# Altium PCB Mixed Signal Board.PcbDoc (part 3 of 3)
Units mm, origin at the board's own origin, x right, y up, seen from the top; angles counter-clockwise.
Board outline 75 x 70 mm, 4 copper layers (Top Layer, GND, VCC, Bottom Layer), stack 1.565 mm thick; 188 components, 143 nets, 738 pads, 413 vias.
Unrouted connection lines stored in the file: 2.
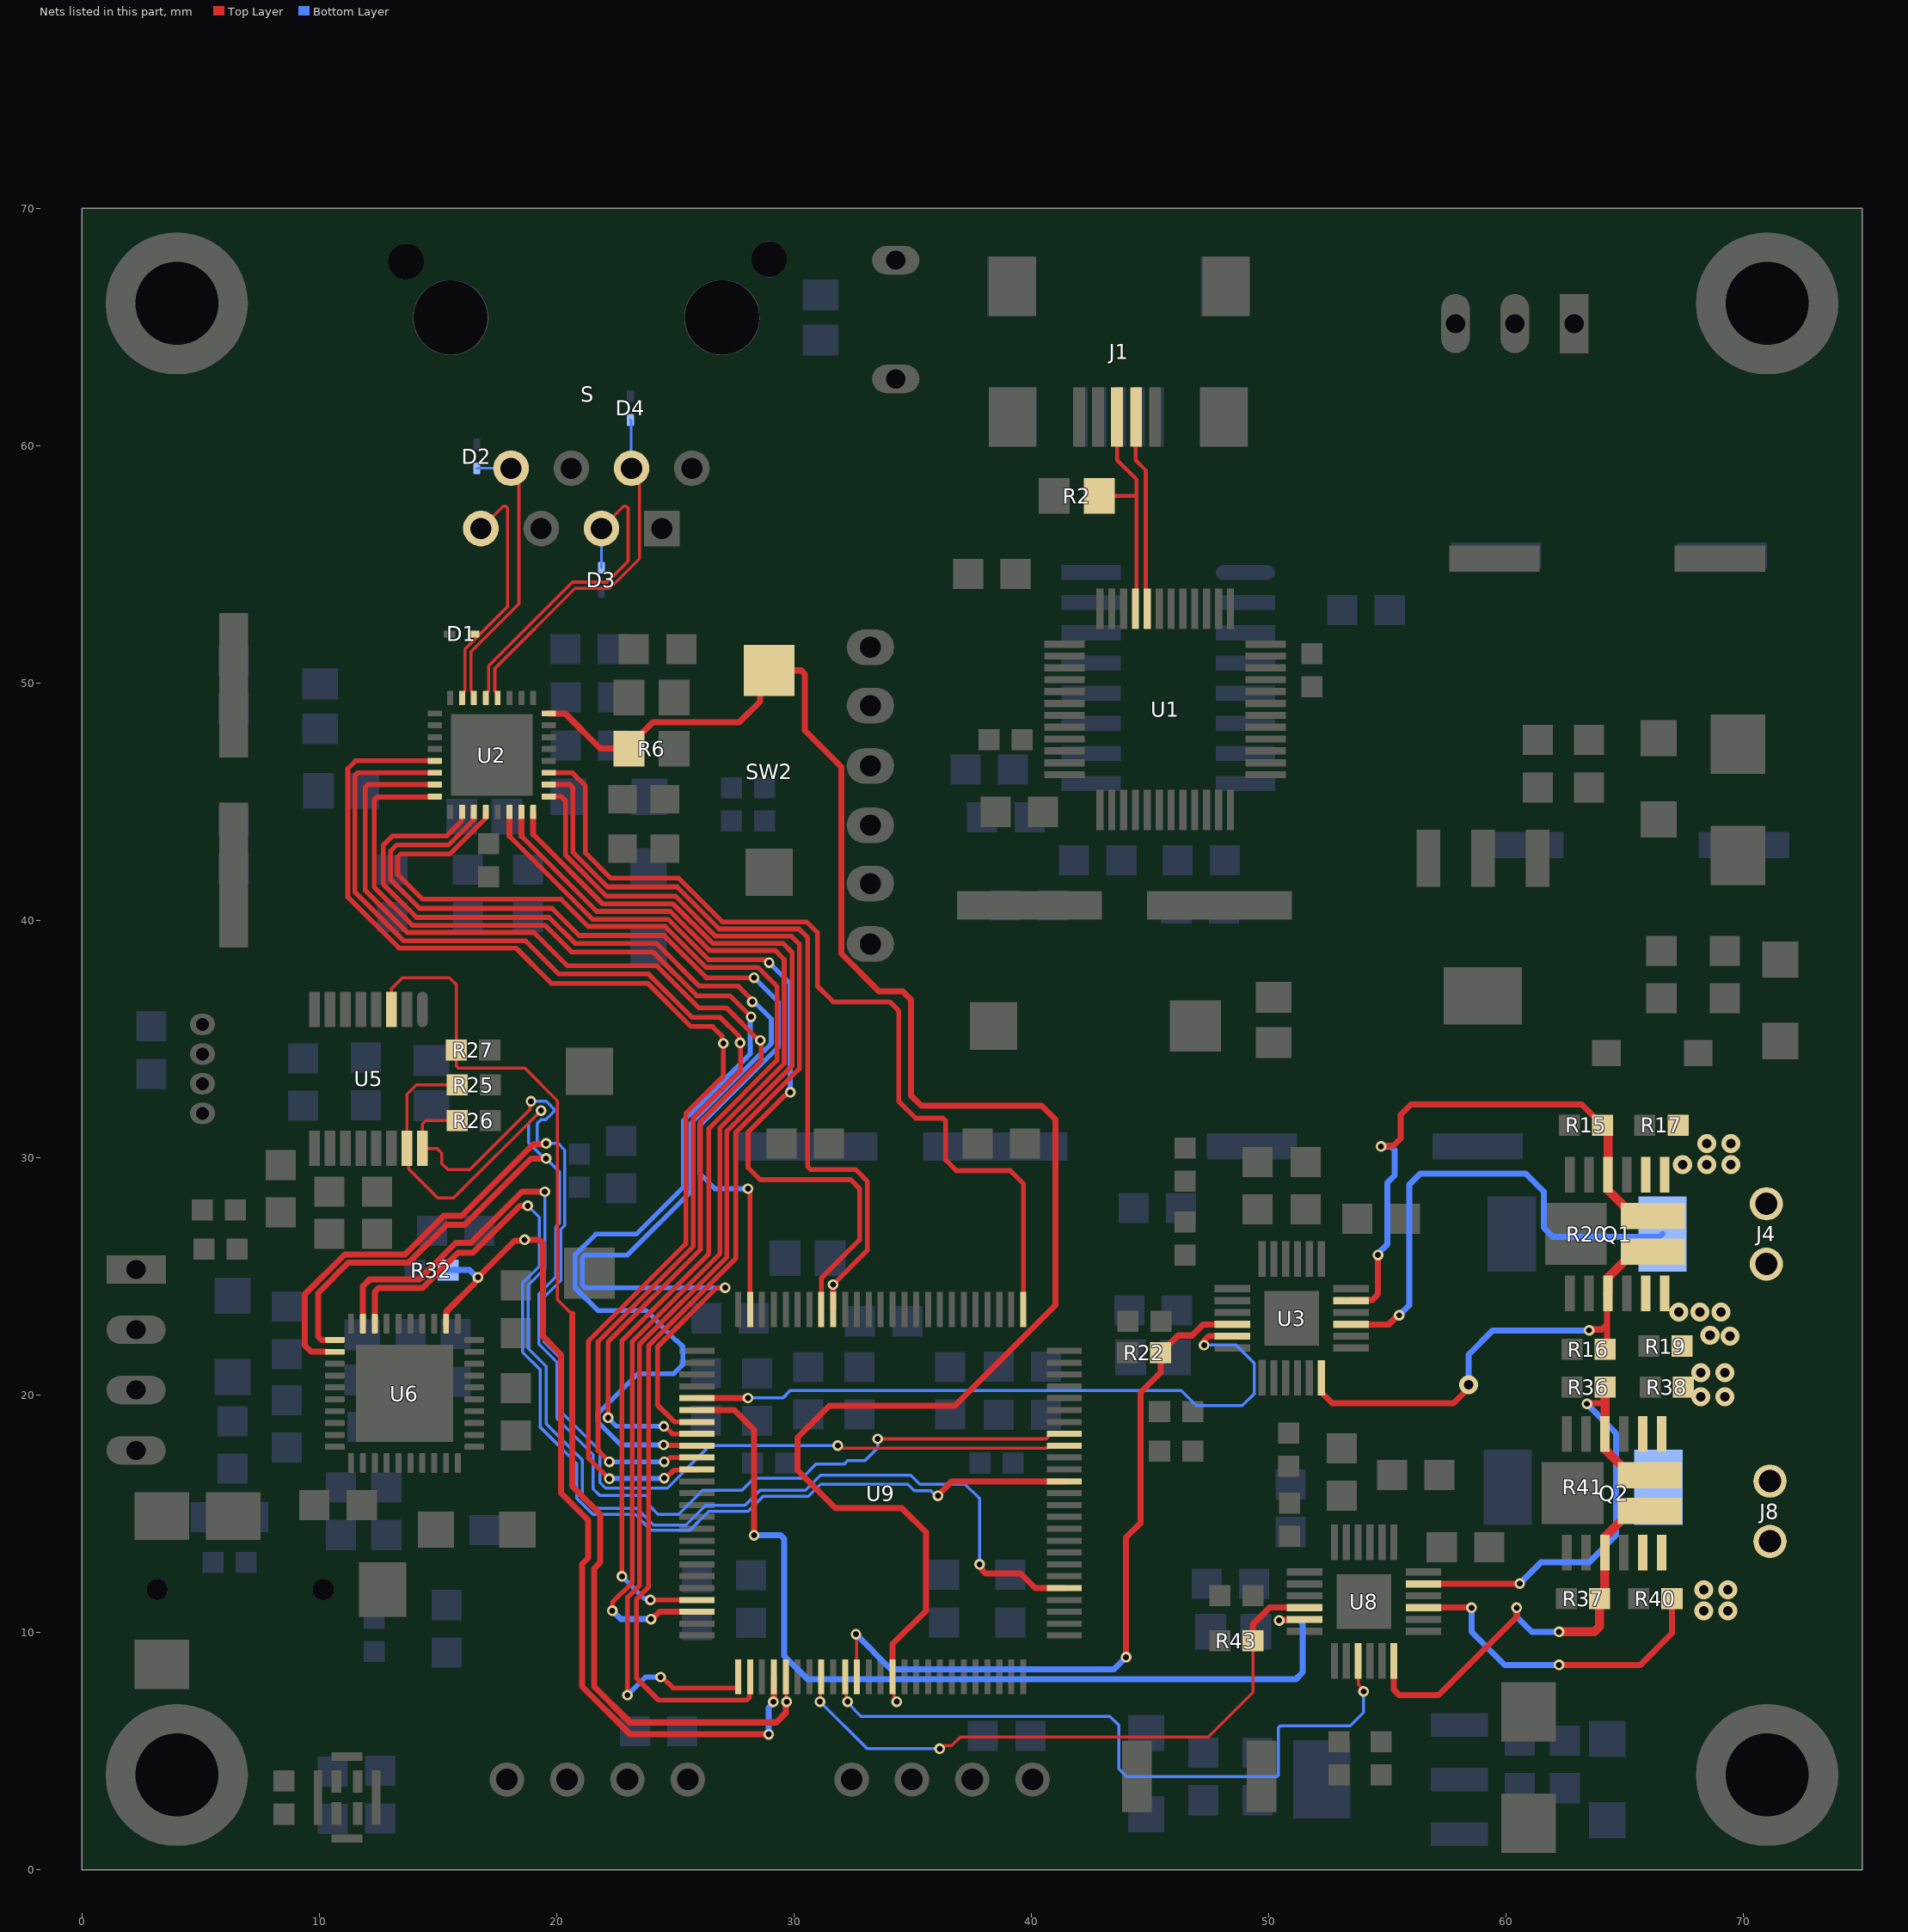
[diagram p5: the nets of this part, all layers, seen from the top]

## Via types
v1: diameter 0.45, hole 0.25, Top Layer to Bottom Layer, 268 vias
v2: diameter 1.27, hole 0.711, Top Layer to Bottom Layer, 82 vias
v3: diameter 0.8, hole 0.4, Top Layer to Bottom Layer, 63 vias

## Nets (pads, with @x,y where several pads share a name; then routed paths per layer and width w, separated by ;. In a path a pad name is that pad's centre, name@x,y a point inside that pad or via, vN(x,y) a via of type N, cw(c..) or ccw(c..) an arc to the next point about the centre after c; other vN are vias at no path point) (continued)
PH_2: U8.15 U9.60 | length 29.8
  Top Layer w0.127: U9.60@32.155,8.137 32.208,8.084 32.208,7.14 v1(32.261,7.088) ; U8.15@53.772,8.799 53.772,7.834 54,7.606 v1(54,7.518)
  Bottom Layer w0.127: v1(32.261,7.088) 32.261,7.043 32.83,6.474 43.31,6.474 43.688,6.096 43.688,4.265 44.016,3.937 50.345,3.937 50.419,4.011 50.419,5.996 50.493,6.071 53.442,6.071 54,6.629 v1(54,7.518)
PHY_RESET: R6.1 SW2.2 U2.32 U9.64 | length 76.8
  Top Layer w0.127: U9.64@34.155,8.137 34.218,8.073 34.218,7.292 34.331,7.179 v1(34.331,7.092)
  Top Layer w0.254: U2.32@19.669,48.727 19.671,48.725 20.363,48.725 21.844,47.244 R6.1@23.053,47.244 23.053,47.344 24.071,48.362 27.711,48.362 28.58,49.23 28.58,50.161 SW2.2@28.956,50.537 30.306,50.537 30.455,50.388 30.455,48.006 31.996,46.464 31.996,38.61 33.598,37.008 34.595,37.008 34.925,36.678 34.925,32.639 35.362,32.202 40.442,32.202 41.021,31.623 41.021,23.793 36.786,19.558 31.496,19.558 30.155,18.217 30.155,16.835 31.75,15.24 34.544,15.24 35.56,14.224 35.56,10.922 34.155,9.517 U9.64@34.155,8.137
RD_N: D4.K S.6 U2.4 | length 15.3
  Top Layer w0.132: U2.4@17.519,49.377 17.519,49.552 17.399,49.673 17.399,50.622 20.777,54 22.247,54 23.495,55.248 23.495,58.351 23.161,58.685 S.6@23.161,59.055
  Bottom Layer w0.114: D4.K@23.114,61.087 23.138,61.063 23.138,59.079 S.6@23.161,59.055
RD_P: D3.K S.5 U2.5 | length 14.9
  Top Layer w0.132: U2.5@17.019,49.377 17.019,49.552 17.14,49.673 17.14,50.729 20.67,54.259 22.14,54.259 23.015,55.134 23.015,57.376 22.938,57.453 22.829,57.453 S.5@21.891,56.515
  Bottom Layer w0.114: D3.K@21.891,54.861 S.5@21.891,56.896
RESET: R27.1 U5.3 U9.55 | length 48.2
  Top Layer w0.127: U5.3@13.051,36.254 13.051,37.139 13.504,37.592 15.494,37.592 15.786,37.3 R27.1@15.786,34.544 15.786,33.856 15.861,33.782 18.669,33.782 20.041,32.41 20.041,24.028 20.64,23.429 20.665,23.429 ; U9.55@29.655,8.137 29.674,8.118 29.674,7.105 v1(29.693,7.087)
  Top Layer w0.254: 20.665,23.429 20.665,16.165 21.844,14.986 21.844,12.954 21.577,12.687 21.577,7.734 23.096,6.216 29.258,6.216 29.655,6.613 29.655,7.049 v1(29.693,7.087)
RESET_DAC: R32.1 U6.32 U9.54 | length 38.1
  Top Layer w0.254: U6.32@15.343,23.015 15.345,23.017 15.345,23.512 16.59,24.757 16.59,24.817 16.688,24.915 v1(16.688,24.968) 18.234,26.514 18.617,26.514 v1(18.655,26.552) ; v1@18.656,26.543 18.665,26.552 19.273,26.552 19.431,26.394 19.431,22.479 20.193,21.717 20.193,15.875 21.336,14.732 21.336,13.144 21.082,12.89 21.082,7.729 23.085,5.726 28.927,5.726 v1(28.938,5.715) ; v1(29.134,7.087) 29.155,7.108 U9.54@29.155,8.137
  Bottom Layer w0.254: R32.1@15.43,25.273 16.33,25.273 16.635,24.968 v1(16.688,24.968) ; v1(28.938,5.715) 28.938,6.84 29.134,7.036 v1(29.134,7.087)
RX_CLK: U2.19 U9.24 | length 40.1
  Top Layer w0.203: U2.19@16.519,44.577 16.496,44.553 16.496,44.229 15.446,43.179 13.256,43.179 13.003,42.926 13.003,41.734 14.224,40.513 19.812,40.513 20.955,39.37 24.527,39.37 26.305,37.592 v1(28.321,37.592) ; v1(28.067,28.702) 28.067,28.635 28.155,28.547 U9.24@28.155,23.613
  Bottom Layer w0.203: v1(28.067,28.702) 26.67,28.702 26.035,29.337 26.035,31.369 29.35,34.684 29.35,36.563 v1(28.321,37.592)
RX_D0: U2.16 U9.34 | length 55.6
  Top Layer w0.203: U2.16@14.869,45.227 14.846,45.204 12.438,45.204 12.319,45.085 12.319,41.402 13.921,39.8 19.509,39.8 20.637,38.672 24.066,38.672 25.908,36.83 27.305,36.83 v1(28.194,35.941) ; v1(24.511,17.907) 24.527,17.891 25.901,17.891 U9.34@25.917,17.875
  Bottom Layer w0.203: v1(24.511,17.907) 22.714,17.907 21.748,18.873 21.748,19.227 23.431,20.91 24.942,20.91 25.325,21.293 25.325,22.046 25.075,22.296 25.043,22.296 23.77,23.57 21.737,23.57 20.779,24.527 20.779,25.915 21.65,26.786 23.357,26.786 25.351,28.78 25.351,31.574 28.159,34.382 28.159,35.906 v1(28.194,35.941)
RX_D1: U2.15 U9.33 | length 49.1
  Top Layer w0.203: U2.15@14.869,45.727 12.057,45.727 11.938,45.608 11.938,41.275 13.716,39.497 19.05,39.497 20.447,38.1 24.209,38.1 25.987,36.322 27.153,36.322 28.524,34.951 28.569,34.951 v1(28.585,34.951) ; v1(22.174,19.05) 22.174,22.251 26.059,26.136 26.059,31.52 28.62,34.081 28.62,34.854 v1@28.569,34.905 ; v1(24.518,18.692) 24.558,18.692 24.875,18.375 U9.33@25.917,18.375
  Bottom Layer w0.203: v1(22.174,19.05) 22.532,18.692 v1(24.518,18.692)
RX_D2: U2.14 U9.35 | length 51.4
  Top Layer w0.203: U2.14@14.869,46.227 14.671,46.227 11.627,46.227 11.508,46.108 11.508,41.197 11.567,41.138 13.56,39.145 18.695,39.145 18.754,39.086 20.093,37.746 23.876,37.746 25.707,35.916 26.899,35.916 27.7,35.114 27.7,34.881 v1(27.732,34.849) ; v1(22.225,17.196) 21.748,17.673 21.748,22.253 25.756,26.261 25.756,31.674 27.747,33.666 27.747,34.849 v1@27.74,34.856 ; v1(24.536,17.196) 24.603,17.196 24.773,17.366 25.908,17.366 U9.35@25.917,17.375
  Bottom Layer w0.203: v1(22.225,17.196) v1(24.536,17.196)
RX_D3: U2.13 U9.36 | length 52.7
  Top Layer w0.203: U2.13@14.869,46.727 11.531,46.727 11.205,46.401 11.205,40.992 13.355,38.842 18.291,38.842 18.35,38.783 19.74,37.393 19.777,37.355 23.839,37.355 25.659,35.535 26.568,35.535 26.978,35.125 26.978,34.871 v1(27.026,34.823) 27.026,33.452 25.449,31.875 25.449,26.383 21.336,22.27 21.336,17.369 v1(22.224,16.482) ; v1(24.536,16.51) 24.603,16.51 24.943,16.85 25.892,16.85 U9.36@25.917,16.875
  Bottom Layer w0.203: v1(22.224,16.482) 22.238,16.496 24.522,16.496 v1(24.536,16.51)
RX_DV: U2.18 U9.32 | length 54.4
  Top Layer w0.203: U2.18@16.019,44.577 15.996,44.553 15.996,44.194 15.367,43.565 13.085,43.565 12.7,43.18 12.7,41.529 14.097,40.132 19.685,40.132 20.779,39.038 24.208,39.038 26.004,37.242 27.655,37.242 27.91,36.987 27.91,36.977 28.245,36.643 v1(28.245,36.576) ; U9.32@25.917,18.875 24.965,18.875 24.257,19.583 24.257,22.047 26.744,24.534 v1(27.104,24.534)
  Bottom Layer w0.203: v1(27.104,24.534) 21.201,24.534 21.082,24.653 21.082,25.789 21.201,25.908 22.987,25.908 25.654,28.575 25.654,31.448 28.715,34.51 28.747,34.51 29.027,34.789 29.027,34.821 29.047,34.841 29.047,35.85 28.444,36.453 28.435,36.453 28.312,36.576 v1(28.245,36.576)
RX_ER: U2.20 U9.47 | length 54.5
  Top Layer w0.203: U2.20@17.019,44.577 16.996,44.553 16.996,44.301 15.494,42.799 13.425,42.799 13.306,42.68 13.306,41.939 14.351,40.894 20.193,40.894 21.336,39.751 24.575,39.751 26.307,38.018 28.498,38.018 29.288,37.228 29.288,34.114 26.416,31.242 26.416,25.959 22.758,22.301 v1(22.758,12.37) ; v1(23.952,11.379) 23.954,11.377 25.915,11.377 U9.47@25.917,11.375
  Bottom Layer w0.203: v1(22.758,12.37) 23.702,11.426 23.905,11.426 v1(23.952,11.379)
SCL: R26.1 U5.16 U6.2 U9.92 | length 65.1
  Top Layer w0.127: R26.1@15.812,31.572 14.5,31.572 14.351,31.423 U5.16@14.351,30.404 14.957,30.404 15.169,30.192 15.169,29.765 15.434,29.5 16.346,29.5 18.885,32.039 18.885,32.347 v1(18.923,32.385) ; v1(31.852,17.882) 31.939,17.882 32.048,17.772 40.68,17.772 40.782,17.875 U9.92@41.393,17.875
  Top Layer w0.254: U6.2@10.365,21.83 9.666,21.83 9.398,22.098 9.398,24.257 11.076,25.935 13.616,25.935 15.24,27.559 16.002,27.559 19.012,30.569 19.52,30.569 v1(19.558,30.607)
  Bottom Layer w0.127: v1(18.923,32.385) 19.558,32.385 19.886,32.057 19.886,31.951 19.54,31.605 19.346,31.605 19.177,31.436 19.177,30.708 19.251,30.634 19.531,30.634 v1(19.558,30.607) 20.066,30.607 20.347,30.326 20.347,27.157 20.185,26.995 20.185,24.837 19.479,24.131 19.479,22.251 20.239,21.491 20.239,19.258 21.835,17.662 21.835,16.321 22.063,16.093 24.669,16.093 26.457,17.882 v1(31.852,17.882)
SCLK: U6.38 U9.89 | length 45.4
  Top Layer w0.254: U6.38@12.343,23.015 12.345,23.017 12.345,24.362 12.502,24.519 14.359,24.519 15.848,26.008 16.483,26.008 18.456,27.981 v1(18.787,27.981) ; v1(36.068,15.768) 36.068,15.795 36.648,16.375 U9.89@41.393,16.375
  Bottom Layer w0.127: v1(18.787,27.981) 19.27,27.498 19.27,25.434 18.571,24.735 18.571,21.815 19.304,21.082 19.304,18.669 20.855,17.118 20.855,15.661 21.53,14.986 23.31,14.986 23.993,14.303 25.606,14.303 26.416,15.113 28.067,15.113 28.702,15.748 30.607,15.748 31.115,16.256 34.798,16.256 35.072,15.982 35.767,15.982 35.981,15.768 v1(36.068,15.768)
SDA: R25.1 U5.15 U6.1 U9.93 | length 67.8
  Top Layer w0.127: R25.1@15.812,33.071 14.097,33.071 13.701,32.675 U5.15@13.701,30.404 13.769,30.335 13.769,29.538 14.986,28.321 15.668,28.321 19.341,31.994 v1(19.347,31.994) ; v1(33.528,18.161) 40.583,18.161 40.588,18.166 40.645,18.166 40.719,18.24 40.719,18.312 40.782,18.375 U9.93@41.393,18.375
  Top Layer w0.254: U6.1@10.658,22.33 10.099,22.33 9.95,22.479 9.95,24.301 11.23,25.581 13.77,25.581 15.367,27.178 16.129,27.178 18.923,29.972 v1(19.558,29.972)
  Bottom Layer w0.127: v1(19.347,31.994) 18.823,31.47 18.823,30.64 19.491,29.972 v1(19.558,29.972) 20.12,29.41 20.12,27.251 19.958,27.089 19.958,24.976 19.252,24.27 19.252,22.157 20.012,21.397 20.012,19.028 21.539,17.501 21.539,16.053 21.819,15.773 23.774,15.773 23.901,15.646 23.901,15.358 24.273,14.986 25.146,14.986 26.162,16.002 27.813,16.002 28.321,16.51 30.346,16.51 30.944,17.109 32.129,17.109 32.265,17.245 32.993,17.245 33.528,17.78 v1(33.528,18.161)
SDIN: U6.39 U9.80 | length 50.3
  Top Layer w0.254: U6.39@11.843,23.015 11.843,24.597 12.119,24.873 14.212,24.873 15.755,26.416 16.383,26.416 18.542,28.575 v1(19.504,28.575) ; v1(37.821,12.878) 37.821,12.825 37.919,12.727 37.919,12.646 38.067,12.497 39.548,12.497 40.17,11.875 U9.80@41.393,11.875
  Bottom Layer w0.127: v1(19.504,28.575) 19.504,25.346 18.798,24.64 18.798,21.969 19.558,21.209 19.558,18.796 21.082,17.272 21.082,15.755 21.597,15.24 23.377,15.24 24.087,14.53 25.452,14.53 26.289,15.367 27.94,15.367 28.575,16.002 30.48,16.002 31.115,16.637 34.925,16.637 35.306,16.256 37.211,16.256 37.821,15.646 v1(37.821,12.878)
SH1: J4.1 Q1.3 Q1.13 R16.2 U3.18 | length 20.5
  Top Layer w0.254: U3.18@52.217,20.733 52.217,20.133 52.686,19.664 57.785,19.664 58.42,20.299 v3(58.42,20.447) ; v1(63.5,22.733) 63.538,22.771 64.046,22.771 64.262,22.987 ; R16.2@64.173,21.946 64.262,22.034 64.262,22.987 ; Q1.3@64.29,24.297 64.262,24.269 64.262,22.987
  Top Layer w0.381: Q1.3@64.29,24.297 64.3,24.306 64.3,24.956 65.39,26.047 Q1.13@66.19,26.047
  Bottom Layer w0.254: v3(58.42,20.447) 58.42,21.717 59.436,22.733 v1(63.5,22.733)
SH1_2: J8.1 Q2.3 Q2.13 R37.2 U8.18 | length 18.7
  Top Layer w0.254: U8.18@55.272,8.799 55.272,7.593 55.499,7.366 57.15,7.366 60.452,10.668 v1(60.452,11.049)
  Top Layer w0.381: v1@62.249,10.033 63.721,10.033 63.945,10.256 R37.2@63.945,11.43 64.154,11.639 64.154,13.366 64.173,13.384 64.173,14.034 65.263,15.125 Q2.13@66.063,15.125
  Bottom Layer w0.254: v1(60.452,11.049) 60.452,10.668 61.087,10.033 v1(62.23,10.033)
SH2: J4.2 Q1.10 Q1.14 R15.2 U3.23 | length 24.5
  Top Layer w0.254: U3.23@53.467,23.987 53.49,24.01 54.363,24.01 54.61,24.257 v1(54.61,25.908) ; v1(54.737,30.48) 54.775,30.518 55.255,30.518 55.559,30.822 55.559,31.817 56,32.258 63.183,32.258 R15.2@64.072,31.369
  Top Layer w0.381: R15.2@64.072,31.369 64.3,31.141 64.3,28.638 65.39,27.547 Q1.14@66.19,27.547
  Bottom Layer w0.254: v1(54.61,25.908) 54.61,25.961 55.007,26.358 55.007,28.957 55.316,29.266 55.316,30.331 55.167,30.48 v1(54.737,30.48)
SH2_2: J8.2 Q2.10 Q2.14 R36.2 U8.23 | length 20.8
  Top Layer w0.254: U8.23@56.522,12.053 56.528,12.059 60.573,12.059 v1(60.579,12.065) ; v1(63.408,19.635) 63.446,19.673 64.173,19.673 R36.2@64.173,20.345
  Top Layer w0.381: Q2.10@64.163,18.375 64.168,18.38 R36.2@64.168,20.34 ; Q2.10@64.173,17.716 65.263,16.625 Q2.14@66.063,16.625
  Bottom Layer w0.254: v1(60.579,12.065) 61.468,12.954 63.5,12.954 64.643,14.097 64.643,18.4 v1(63.408,19.635)
SNSOUT: R22.1 U3.10 U9.61 | length 31
  Top Layer w0.127: v1(32.614,9.931) 32.634,9.911 32.634,8.158 U9.61@32.655,8.137
  Top Layer w0.254: v1(43.993,8.966) 43.993,14.013 44.599,14.62 44.599,20.114 45.453,20.968 R22.1@45.453,21.793 46.177,22.517 46.774,22.517 47.243,22.987 U3.10@48.467,22.987
  Bottom Layer w0.254: v1(32.614,9.931) 34.085,8.46 43.486,8.46 v1(43.993,8.966)
SNSOUT_2: R43.1 U8.10 U9.58 | length 26.5
  Top Layer w0.127: v1(31.099,7.09) 31.127,7.118 31.127,8.109 U9.58@31.155,8.137 ; v1(36.144,5.105) 36.232,5.105 36.362,5.235 36.65,5.235 37.015,5.6 47.46,5.6 49.339,7.48 R43.1@49.339,9.652
  Top Layer w0.254: R43.1@49.339,9.652 49.339,10.347 50.045,11.053 U8.10@51.522,11.053
  Bottom Layer w0.127: v1(31.099,7.09) 33.084,5.105 v1(36.144,5.105)
SO: U3.11 U9.30 | length 29.3
  Top Layer w0.254: U9.30@25.917,19.875 28.059,19.875 v1(28.067,19.883) ; v1(47.282,22.11) 47.282,22.303 47.466,22.487 U3.11@48.467,22.487
  Bottom Layer w0.127: v1(28.067,19.883) 29.535,19.883 29.845,20.193 46.314,20.193 46.89,19.617 46.949,19.558 48.895,19.558 49.403,20.066 49.403,21.336 48.629,22.11 v1(47.282,22.11)
SO_2: U8.11 U9.31 | length 40
  Top Layer w0.254: U9.31@25.917,19.375 27.488,19.375 28.321,18.542 v1(28.321,14.097) ; v1(50.44,10.515) 50.459,10.534 51.503,10.534 U8.11@51.522,10.553
  Bottom Layer w0.254: v1(28.321,14.097) 29.442,14.097 29.591,13.948 29.591,9.017 30.58,8.028 51.135,8.028 51.435,8.328 51.435,10.367 51.286,10.515 v1(50.44,10.515)
SP: Q1.5 Q1.6 Q1.7 Q1.8 R17.2 R19.2 R20.2 U3.21 | length 20.8
  Top Layer w0.254: U3.21@53.467,22.987 55.065,22.987 55.446,23.368 v1(55.499,23.368)
  Bottom Layer w0.254: v1(55.499,23.368) 55.499,23.371 55.926,23.798 55.926,28.875 56.388,29.337 60.833,29.337 61.595,28.575 61.595,27.051 61.976,26.67 66.468,26.67 R20.2@66.595,26.797
  other v3: 69.44,22.488 68.595,22.525 67.281,23.504 68.17,23.504 69.059,23.504 67.437,29.718 68.453,29.718 69.469,29.718 68.453,30.607 69.469,30.607
SP_2: Q2.5 Q2.6 Q2.7 Q2.8 R38.2 R40.2 R41.2 U8.21 | length 14.1
  Top Layer w0.254: U8.21@56.522,11.053 58.543,11.053 v1(58.547,11.049) ; v1(62.23,8.636) 65.659,8.636 66.993,9.97 R40.2@66.993,11.43
  Bottom Layer w0.254: v1(58.547,11.049) 58.547,10.033 59.944,8.636 v1(62.23,8.636)
  other v3: 68.326,10.922 69.342,10.922 68.326,11.811 69.342,11.811 68.199,19.939 69.215,19.939 68.199,20.955 69.215,20.955
TD_N: D2.K S.2 U2.6 | length 12.1
  Top Layer w0.132: U2.6@16.519,49.377 16.519,49.552 16.399,49.673 16.399,51.324 18.415,53.34 18.415,58.351 18.081,58.685 S.2@18.081,59.055
  Bottom Layer w0.114: D2.K@16.637,59.058 16.64,59.055 S.2@18.081,59.055
TD_P: D1.K S.1 U2.7 | length 10.3
  Top Layer w0.132: U2.7@16.019,49.377 16.019,49.552 16.14,49.673 16.14,51.431 16.689,51.98 17.935,53.226 17.935,57.376 17.858,57.453 17.749,57.453 S.1@16.811,56.515
TX_CLK: U2.22 U9.18 | length 34.6
  Top Layer w0.203: 18.021,43.55 21.518,40.054 24.7,40.054 26.4,38.354 28.837,38.354 28.956,38.235 v1(28.956,38.227) ; v1(29.845,32.766) 29.778,32.766 29.655,32.643 29.626,32.643 28.067,31.083 28.067,29.591 28.575,29.083 32.393,29.083 32.766,28.71 32.766,26.543 31.155,24.932 U9.18@31.155,23.613
  Top Layer w0.254: 18.021,43.55 U2.22@18.021,44.404
  Bottom Layer w0.203: v1(28.956,38.227) 29.845,37.338 v1(29.845,32.766)
TX_D0: U2.24 U9.51 | length 53.7
  Top Layer w0.203: 19.019,43.62 21.937,40.702 24.909,40.702 26.573,39.038 29.542,39.038 29.923,38.657 29.923,33.876 27.178,31.131 27.178,25.825 23.495,22.142 23.495,11.989 22.987,11.481 v1(22.987,7.366) ; v1(24.384,8.128) 24.451,8.128 24.908,7.671 27.63,7.671 27.655,7.696 U9.51@27.655,8.137
  Top Layer w0.254: 19.019,43.62 U2.24@19.019,44.577
  Bottom Layer w0.203: v1(22.987,7.366) 23.749,8.128 v1(24.384,8.128)
TX_D1: U2.25 U9.52 | length 54.3
  Top Layer w0.203: U2.25@19.669,45.227 20.198,45.227 20.378,45.047 20.378,42.758 22.115,41.021 25.019,41.021 26.699,39.341 29.898,39.341 30.226,39.013 30.226,33.75 27.559,31.083 27.559,25.778 23.876,22.095 23.876,11.913 23.368,11.405 23.368,8.08 24.291,7.157 28.011,7.157 28.13,7.276 28.13,8.112 U9.52@28.155,8.137
TX_D2: U2.26 U9.17 | length 33.6
  Top Layer w0.203: U2.26@19.669,45.727 20.562,45.727 20.681,45.608 20.681,42.884 22.147,41.418 25.082,41.418 26.856,39.644 30.214,39.644 30.582,39.276 30.582,29.632 30.701,29.513 32.59,29.513 33.095,29.008 33.095,26.11 v1(31.648,24.663)
  Top Layer w0.254: v1(31.648,24.663) 31.655,24.657 U9.17@31.655,23.613
TX_D3: U2.27 U9.1 | length 38.7
  Top Layer w0.203: U2.27@19.669,46.227 20.664,46.227 21.215,45.676 21.215,42.85 22.282,41.783 25.146,41.783 26.982,39.947 30.538,39.947 30.988,39.497 30.988,37.243 31.655,36.576 34.036,36.576 34.417,36.195 34.417,32.385 35.128,31.674 36.279,31.674 36.398,31.555 36.398,29.909 36.844,29.464 39.116,29.464 39.675,28.905 39.675,23.633 U9.1@39.655,23.613
TX_EN: U2.23 U9.48 | length 48.3
  Top Layer w0.203: 18.521,43.558 21.694,40.386 24.797,40.386 26.448,38.735 29.218,38.735 29.591,38.362 29.591,33.972 26.875,31.256 26.875,25.951 23.192,22.268 23.192,12.118 22.352,11.278 v1(22.352,10.922)
  Top Layer w0.254: 18.521,43.558 U2.23@18.521,44.404 ; v1(23.978,10.566) 24.031,10.566 24.339,10.875 U9.48@25.917,10.875
  Bottom Layer w0.254: v1(22.352,10.922) 22.708,10.566 v1(23.978,10.566)
USBD_N: J1.2 U1.32 | length 7.9
  Top Layer w0.166: J1.2@44.38,60.794 44.397,60.777 44.397,59.393 44.823,58.966 44.823,53.2 U1.32@44.89,53.133
USBD_P: J1.3 R2.1 U1.33 | length 9.6
  Top Layer w0.166: R2.1@42.86,57.887 44.427,57.887 ; J1.3@43.58,60.794 43.62,60.754 43.62,59.393 44.427,58.586 44.427,57.887 ; U1.33@44.39,53.133 44.427,53.17 44.427,57.887
pads on no net: J1.1 J1.4 J5.1 J5.4 J7. J7.4 J12. MH2.1 MH3.1 S. S.3 S.4 S.7 S.8 U1.2 U1.3 U1.4 U1.10 U1.11 U1.12 U1.13 U1.14 U1.15 U1.16 U1.17 U1.19 U1.21 U1.22 U1.28 U1.29 U1.30 U1.31 U1.41 U1.42 U1.43 U1.45 U1.46 U2.30 U2.31 U4.7 U4.8 U4.9 U4.10 U4.11 U4.12 U4.13 U4.15 U5.6 U5.7 U5.8 U5.9 U6.20 U6.21 U6.22 U6.23 U6.24 U6.25 U6.26 U6.29 U6.30 U6.36 U9.2 U9.3 U9.4 U9.5 U9.7 U9.8 U9.9 U9.15 U9.38 U9.39 U9.40 U9.41 U9.42 U9.43 U9.44 U9.46 U9.67 U9.77 U9.81 U9.82 U9.83 U9.84 U9.85 U9.86 U9.87 U9.88 U9.91 U9.95 U9.96 U9.97 U9.98

## Polygon pours and split planes (outlines as drawn)
EARTH on Bottom Layer (solid, pour order 112): 59.563,63.754 61.214,63.754 61.214,68.834 66.04,68.834 66.294,68.58 66.294,63.119 67.691,61.722 74.93,61.722 74.93,69.977 0,69.977 -0.127,69.85 -0.127,61.722 16.637,61.722 24.511,69.596 30.607,69.596 30.607,66.294 36.921,66.294 36.921,68.834 59.563,68.834
NetC21_2 on Bottom Layer "NETC21_2_L04_P111" (solid, pour order 111): 29.972,65.278 29.972,61.976 35.56,61.976 35.56,65.278
NetC73_1 on Bottom Layer "NETC73_1_L04_P087" (solid, pour order 87): 34.671,31.877 41.91,31.877 41.91,29.464 34.671,29.464
+3V3 on Bottom Layer "+3V3_L04_P053" (solid, pour order 53): 13.462,25.527 13.462,24.054 17.653,24.054 17.653,24.638 14.834,24.638 14.834,26.035 15.621,26.035 15.621,27.559 13.462,27.559
GND on Bottom Layer "GND_L04_P101" (solid, pour order 101): 24.282,11.303 29.21,11.303 29.21,13.462 24.282,13.462
GND on Bottom Layer "GND_L04_P099" (solid, pour order 99): 39.37,21.971 39.37,20.32 34.163,20.32 34.163,23.749 35.433,23.749 35.433,21.971
GND on Bottom Layer "GND_L04_P098" (solid, pour order 98): 59.842,4.572 65.303,4.572 65.303,7.976 56.667,7.976 56.667,4.699 59.817,4.699 59.817,4.597
GND on Bottom Layer "GND_L04_P097" (solid, pour order 97): 25.527,19.685 29.845,19.685 29.845,19.939 33.528,19.939 33.528,18.288 29.21,18.288 25.527,18.288
GND on Bottom Layer "GND_L04_P096" (solid, pour order 96): 43.942,6.731 43.942,4.191 50.292,4.191 50.292,5.969 45.847,5.969 45.847,6.731
GND on Bottom Layer "GND_L04_P095" (solid, pour order 95): 9.398,2.794 9.398,0.635 13.462,0.635 13.462,2.794
+3V3 on Bottom Layer "+3V3_L04_P090" (solid, pour order 90): 9.398,5.461 14.986,5.461 14.986,2.921 9.398,2.921
NetC74_1 on Bottom Layer "NETC74_1_L04_P085" (solid, pour order 85): 27.178,31.623 34.417,31.623 34.417,29.464 27.178,29.464
NetC68_2 on Bottom Layer "NETC68_2_L04_P084" (solid, pour order 84): 27.432,24.384 27.432,20.193 29.464,20.193 29.464,22.225 31.75,22.225 31.75,20.32 33.909,20.32 33.909,24.003 30.734,24.003 30.734,27.559 28.575,27.559 28.575,24.384
+1V8 on Bottom Layer "+1V8_L04_P080" (solid, pour order 80): 59.436,4.572 59.436,3.048 53.594,3.048 53.594,1.143 41.783,1.143 41.783,3.683 50.8,3.683 50.8,5.715 53.721,5.715 53.721,4.572 56.388,4.572
NetC87_2 on Bottom Layer "NETC87_2_L04_P078" (solid, pour order 78): 56.769,2.413 59.817,2.413 59.817,4.318 63.246,4.318 63.246,3.175 65.405,3.175 65.405,0.508 56.769,0.508
GND on Bottom Layer "GND_L04_P076" (solid, pour order 76): 58.674,19.431 61.214,19.431 61.214,13.843 60.071,13.843 59.944,13.716 59.944,12.827 58.674,12.827
GND on Bottom Layer "GND_L04_P074" (solid, pour order 74): 44.45,31.369 51.816,31.369 51.816,29.718 44.45,29.718
GND on Bottom Layer "GND_L04_P073" (solid, pour order 73): 46.482,12.954 48.26,12.954 48.26,10.795 48.26,9.017 46.482,9.017
GND on Bottom Layer "GND_L04_P072" (solid, pour order 72): 43.307,20.574 45.212,20.574 45.212,24.384 44.323,24.384 44.323,26.543 43.307,26.543
+12V on Bottom Layer "+12V_L04_P069" (solid, pour order 69): 55.372,35.179 55.245,35.052 55.245,31.369 56.515,31.369 56.642,31.242 56.642,29.718 56.769,29.591 60.96,29.591 61.087,29.718 61.087,31.369 60.96,31.496 59.817,31.496 59.69,31.623 59.69,35.052 59.563,35.179
+3V3 on Bottom Layer "+3V3_L04_P015" (solid, pour order 15): 38.379,56.261 38.379,53.67 41.097,53.67 41.097,56.261
SP_2 on Bottom Layer "SP_2_L04_P058" (solid, pour order 58): 66.675,21.463 70.231,21.463 70.231,18.161 70.231,12.7 70.231,10.541 66.675,10.541
+1V8 on Bottom Layer "+1V8_L04_P054" (solid, pour order 54): 10.795,23.368 17.145,23.368 17.145,21.59 10.795,21.59
GND on Bottom Layer "GND_L04_P052" (solid, pour order 52): 13.056,21.311 13.056,17.755 16.637,17.755 16.637,19.66 16.637,21.311 13.183,21.311
GND on Bottom Layer "GND_L04_P050" (solid, pour order 50): 16.002,15.367 16.002,13.335 17.907,13.335 17.907,11.557 19.558,11.557 19.558,15.367
+3V3 on Bottom Layer "+3V3_L04_P047" (solid, pour order 47): 5.207,17.907 7.493,17.907 7.493,20.701 9.652,20.701 9.652,22.733 5.207,22.733
NetC37_2 on Bottom Layer "NETC37_2_L04_P046" (solid, pour order 46): 11.024,21.336 12.598,21.336 12.598,17.018 13.843,17.018 13.843,15.24 9.906,15.24 9.906,17.018 11.024,17.018
+3V3 on Bottom Layer "+3V3_L04_P045" (solid, pour order 45): 11.049,33.02 11.049,31.242 12.065,31.242 12.065,29.591 12.7,29.591 12.7,31.242 15.621,31.242 15.621,33.02
SP on Bottom Layer "SP_L04_P042" (solid, pour order 42): 66.655,31.115 66.655,21.717 70.084,21.717 70.084,31.115
GND on Bottom Layer "GND_L04_P034" (solid, pour order 34): 62.535,43.891 62.535,42.57 58.293,42.57 58.293,38.1 54.864,38.1 54.864,43.891
+12V on Bottom Layer "+12V_L04_P029" (solid, pour order 29): 68.072,41.148 74.422,41.148 74.422,45.466 68.072,45.466
GND on Bottom Layer "GND_L04_P026" (solid, pour order 26): 57.29,56.388 57.29,52.451 62.09,52.451 62.09,56.388
+12V on Bottom Layer "+12V_L04_P025" (solid, pour order 25): 65.532,59.944 65.532,54.102 73.152,54.102 73.152,59.944
GND on Bottom Layer "GND_L04_P023" (solid, pour order 23): 38.252,47.295 38.252,45.263 38.913,45.263 38.913,43.383 35.814,43.383 35.814,47.295
GND on Bottom Layer "GND_L04_P020" (solid, pour order 20): 36.322,55.626 36.195,55.499 36.195,51.943 38.227,51.943 38.227,55.626
+3V3 on Bottom Layer "+3V3_L04_P018" (solid, pour order 18): 41.097,56.261 43.815,56.261 43.815,55.601 43.815,54.102 41.097,54.102
+3V3 on Bottom Layer "+3V3_L04_P012" (solid, pour order 12): 47.244,45.339 47.244,47.752 44.323,47.752 44.323,45.339
+3V3 on Bottom Layer "+3V3_L04_P011" (solid, pour order 11): 42.799,45.339 42.799,41.529 47.244,41.529 47.244,45.339
GND on Bottom Layer "GND_L04_P010" (solid, pour order 10): 25.019,41.021 12.827,41.021 8.382,41.021 8.382,37.846 8.636,37.592 25.019,37.592 25.273,37.846 25.273,40.767
GND on Bottom Layer "GND_L04_P009" (solid, pour order 9): 24.117,52.197 26.924,52.197 27.051,52.324 27.051,53.34 26.924,53.467 22.479,53.467 22.225,53.213 22.225,52.832 24.117,52.832
GND on Bottom Layer "GND_L04_P007" (solid, pour order 7): 24.117,50.279 24.117,46.088 24.879,46.088 25.006,45.961 25.006,44.437 24.752,44.183 22.974,44.183 22.72,44.437 22.72,46.342 22.466,46.596 21.577,46.596 21.45,46.723 21.45,52.057 22.225,52.832 24.117,52.832
NetC11_2 on Bottom Layer "NETC11_2_L04_P003" (solid, remove dead copper, pour order 3): 21.209,52.705 21.209,50.673 19.327,50.673 19.304,50.696 19.304,52.197 19.812,52.705
+3V3 on Bottom Layer "+3V3_L04_P005" (solid, pour order 5): 10.287,41.275 8.89,41.275 8.89,43.307 10.287,43.307
+3V3 on Bottom Layer "+3V3_L04_P004" (solid, pour order 4): 10.287,43.307 12.827,43.307 12.827,45.339 17.018,45.339 17.018,43.434 19.812,43.434 24.892,43.434 24.892,41.402 24.765,41.275 10.287,41.275
NetC21_2 on Top Layer "NETC21_2_L01_P109" (solid, pour order 109): 32.258,65.278 33.147,65.278 33.147,63.754 35.56,63.754 35.56,61.595 33.02,61.595 33.02,62.865 29.464,62.865 29.464,66.04 28.321,67.183 12.319,67.183 12.319,69.088 32.258,69.088
GND on Top Layer "GND_L01_P102" (solid, pour order 102): 10.541,1.524 10.541,0.762 13.081,0.762 13.081,4.191 12.192,4.191 12.192,1.524
no net on Top Layer "NONET_L01_P094" (solid, pour order 94): 10.795,31.242 10.795,29.464 11.684,29.464 11.684,27.686 10.16,27.686 10.16,26.162 11.557,26.162 11.557,27.432 11.684,27.432 11.811,27.559 11.811,29.591 11.43,29.591 11.43,31.242
+1V8 on Top Layer "+1V8_L01_P093" (solid, pour order 93): 42.672,5.207 42.672,1.778 43.561,1.778 45.466,1.778 45.466,5.207 45.212,5.207 43.688,5.207
+3V3 on Top Layer "+3V3_L01_P092" (solid, pour order 92): 15.113,6.985 15.113,3.277 13.843,3.277 13.843,6.096 10.414,6.096 10.414,4.318 11.049,4.318 11.049,3.048 10.287,3.048 10.287,4.318 9.271,4.318 9.271,3.048 7.62,3.048 7.62,6.985
NetC73_1 on Top Layer "NETC73_1_L01_P088" (solid, pour order 88): 36.132,31.445 36.132,29.337 34.735,29.337 34.735,31.445
NetC74_1 on Top Layer "NETC74_1_L01_P086" (solid, pour order 86): 34.417,31.496 34.417,29.388 33.02,29.388 33.02,31.496
NetC87_2 on Top Layer "NETC87_2_L01_P079" (solid, pour order 79): 56.769,2.413 56.769,0.508 65.532,0.508 65.532,3.175 63.246,3.175 63.246,4.318 59.563,4.318 59.563,2.413
+12V on Top Layer "+12V_L01_P077" (solid, pour order 77): 59.309,8.001 67.564,8.001 67.564,4.445 59.309,4.445
+12V on Top Layer "+12V_L01_P039" (solid, pour order 39): 63.119,23.368 63.881,23.368 63.881,25.476 64.262,25.476 64.262,28.118 56.871,28.118 56.871,22.2 60.96,22.2 60.96,25.476 63.119,25.476
GND on Top Layer "GND_L01_P075" (solid, pour order 75): 44.45,31.369 48.26,31.369 48.26,29.718 44.45,29.718
+12V on Top Layer "+12V_L01_P067" (solid, pour order 67): 50.546,30.861 50.546,28.956 52.959,28.956 52.959,30.607 55.245,32.893 60.071,32.893 60.071,35.179 55.372,35.179 55.245,35.052 55.245,34.163 51.943,30.861 50.927,30.861
+12V on Top Layer "+12V_L01_P071" (solid, pour order 71): 60.198,14.351 56.185,14.351 56.185,17.526 63.754,17.526 63.754,17.399 64.07,17.399 64.389,17.08 64.389,14.67 64.07,14.351
+12V on Top Layer "+12V_L01_P070" (solid, pour order 70): 55.016,12.852 58.268,12.852 58.268,18.948 54.077,18.948 54.077,17.602 56.185,17.602 56.185,15.672 56.159,15.646 55.016,15.646
SP on Top Layer "SP_L01_P040" (solid, pour order 40): 65.405,29.781 65.405,28.448 65.532,28.448 67.183,28.448 67.183,29.083 67.437,29.337 72.517,29.337 72.517,31.877 67.37,31.877
SP_2 on Top Layer "SP_2_L01_P064" (solid, pour order 64): 65.405,12.192 66.294,12.192 66.294,10.287 70.485,10.287 70.485,12.319 67.564,12.319 67.564,14.224 65.405,14.224
+12V on Top Layer "+12V_L01_P063" (solid, pour order 63): 62.992,19.304 62.992,17.399 61.341,17.399 61.341,14.351 62.992,14.351 62.992,12.446 63.754,12.446 63.754,14.351 64.389,14.351 64.389,17.399 63.754,17.399 63.754,19.304
SH1_2 on Top Layer "SH1_2_L01_P060" (solid, pour order 60): 66.929,15.672 66.929,14.58 67.818,14.58 67.818,12.7 72.212,12.7 72.212,14.986 69.85,14.986 69.85,15.672
SH2_2 on Top Layer "SH2_2_L01_P059" (solid, pour order 59): 66.929,17.17 66.929,16.078 70.053,16.078 70.053,15.138 72.212,15.138 72.212,17.17
SP_2 on Top Layer "SP_2_L01_P056" (solid, pour order 56): 65.43,19.291 65.43,17.564 67.208,17.564 68.326,17.564 68.326,19.52 71.247,19.52 71.247,21.399 66.777,21.399 66.777,19.291
GND on Top Layer "GND_L01_P051" (solid, pour order 51): 16.078,15.418 16.078,13.386 17.983,13.386 17.983,11.608 19.634,11.608 19.634,15.418
+3V3 on Top Layer "+3V3_L01_P044" (solid, pour order 44): 11.049,33.02 11.049,32.08 12.141,32.08 12.141,29.591 12.649,29.591 12.649,31.293 13.437,31.293 13.437,33.02
GND on Top Layer "GND_L01_P043" (solid, pour order 43): 10.795,35.283 10.795,33.274 13.64,33.274 13.64,35.283
SP on Top Layer "SP_L01_P041" (solid, pour order 41): 65.583,22.606 65.583,25.126 65.687,25.126 67.234,25.126 67.234,24.595 67.592,24.237 72.545,24.237 72.545,23.221 72.545,21.615 66.573,21.615
SH1 on Top Layer "SH1_L01_P038" (solid, pour order 38): 67.107,26.594 67.107,25.476 67.437,25.146 67.437,24.638 67.691,24.384 72.542,24.384 72.542,26.594
SH2 on Top Layer "SH2_L01_P036" (solid, pour order 36): 67.107,27 72.568,27 72.568,29.21 67.589,29.21 67.386,29.007 67.386,28.397 67.107,28.118
+3V3 on Top Layer "+3V3_L01_P033" (solid, remove dead copper, pour order 33): 57.15,37.846 70.104,37.846 70.104,37.084 72.898,37.084 72.898,33.655 67.183,33.655 67.183,35.814 57.15,35.814
+12V on Top Layer "+12V_L01_P030" (solid, pour order 30): 68.06,41.096 74.41,41.096 74.41,45.414 68.06,45.414
NetC81_2 on Top Layer "NETC81_2_L01_P028" (solid, pour order 28): 55.88,41.148 57.582,41.148 57.582,45.796 58.369,46.584 68.072,46.584 68.072,45.72 71.476,45.72 71.476,48.895 58.039,48.895 55.88,46.736
GND on Top Layer "GND_L01_P027" (solid, pour order 27): 57.29,56.388 57.29,50.165 62.738,50.165 62.738,56.388
+12V on Top Layer "+12V_L01_P024" (solid, pour order 24): 65.532,59.944 65.532,54.102 73.152,54.102 73.152,59.944
GND on Top Layer "GND_L01_P022" (solid, pour order 22): 39.37,45.339 39.37,43.739 35.56,43.739 35.56,45.339 37.846,45.339
GND on Top Layer "GND_L01_P019" (solid, pour order 19): 36.322,55.626 38.227,55.626 38.227,51.943 36.195,51.943 36.195,55.499
+3V3 on Top Layer "+3V3_L01_P016" (solid, pour order 16): 38.379,55.626 38.379,53.67 42.443,53.67 42.443,52.222 43.104,52.222 43.104,55.347 42.824,55.626
+3V3 on Top Layer "+3V3_L01_P013" (solid, pour order 13): 46.685,47.549 46.685,44.806 46.685,43.815 47.092,43.815 47.092,49.149 44.323,49.149 44.323,47.549
NetC11_2 on Top Layer "NONET_L01_P002" (solid, pour order 2): 18.745,50.419 18.288,49.962 18.288,48.844 17.78,48.844 17.78,50.546 20.066,52.832 21.844,52.832 21.844,52.07 21.158,52.07 21.158,50.419
+3V3 on VCC (split plane): 218 vertices, not listed, extent 0.51,0.51 73.023,63.379
+12V on VCC (split plane): 65.919,68.118 65.919,63.246 65.928,63.148 65.957,63.054 66.003,62.967 66.066,62.891 67.59,61.367 67.666,61.304 67.753,61.258 67.847,61.229 67.945,61.22 74.49,61.22 74.49,0.51 56.771,0.51 56.771,32.637 71.755,32.637 71.83,32.645 71.902,32.666 71.968,32.702 72.026,32.749 73.677,34.4 73.724,34.458 73.76,34.524 73.781,34.596 73.789,34.671 73.789,38.481 73.781,38.556 73.76,38.628 73.724,38.694 73.677,38.752 72.407,40.022 72.349,40.069 72.283,40.105 72.211,40.126 72.136,40.134 68.201,40.134 68.201,48.514 68.193,48.589 68.172,48.661 68.136,48.727 68.089,48.785 67.581,49.293 67.523,49.34 67.457,49.376 67.385,49.397 67.31,49.405 64.675,49.405 64.01,50.07 64.01,58.039 64.002,58.114 63.981,58.186 63.945,58.252 63.898,58.31 61.739,60.469 61.681,60.516 61.615,60.552 61.543,60.573 61.468,60.581 55.023,60.581 53.723,61.881 53.723,63.559 53.758,63.602 53.804,63.689 53.833,63.783 53.842,63.881 53.842,65.62 56.427,68.205 65.832,68.205
EARTH on VCC (split plane): 74.49,62.224 68.153,62.224 66.923,63.454 66.923,68.326 66.914,68.424 66.885,68.518 66.839,68.605 66.776,68.681 66.395,69.062 66.319,69.125 66.232,69.171 66.138,69.2 66.04,69.209 56.388,69.209 56.29,69.2 56.196,69.171 56.109,69.125 56.033,69.062 55.97,68.986 55.924,68.899 55.895,68.805 55.89,68.75 53.297,66.157 53.242,66.152 53.148,66.123 53.061,66.077 52.985,66.014 52.922,65.938 52.876,65.851 52.847,65.757 52.838,65.659 52.838,64.383 18.669,64.383 18.571,64.374 18.477,64.345 18.39,64.299 18.314,64.236 16.302,62.224 0.51,62.224 0.51,69.49 74.49,69.49
+1V8 on VCC (split plane): 17.715,22.86 17.715,12.638 15.621,12.638 15.571,12.632 15.525,12.612 15.485,12.582 15.455,12.542 15.435,12.496 15.429,12.446 15.429,8.97 13.89,7.431 12.065,7.431 12.015,7.425 11.969,7.405 11.929,7.375 11.899,7.335 11.879,7.289 11.873,7.239 11.873,2.667 11.879,2.617 11.891,2.59 11.899,2.571 11.929,2.531 12.31,2.15 12.35,2.12 12.369,2.112 12.396,2.1 12.446,2.094 40.894,2.094 40.944,2.1 40.971,2.112 40.99,2.12 41.03,2.15 41.665,2.785 41.695,2.825 41.715,2.871 41.721,2.921 41.721,5.635 42.244,6.158 51.736,6.158 52.386,5.508 52.386,0.51 0.51,0.51 0.51,8.698 13.081,8.698 13.131,8.704 13.158,8.716 13.177,8.724 13.217,8.754 13.344,8.881 13.374,8.921 13.394,8.967 13.4,9.017 13.4,13.905 15.875,13.905 15.925,13.911 15.971,13.931 16.011,13.961 16.041,14.001 16.061,14.047 16.067,14.097 16.067,20.32 16.061,20.37 16.041,20.416 16.011,20.456 15.971,20.486 15.925,20.506 15.875,20.512 11.114,20.512 11.114,23.557 17.715,23.557
GND on GND (split plane): 74.49,0.51 0.51,0.51 0.51,7.047 13.97,7.047 14.02,7.053 14.047,7.065 14.066,7.073 14.106,7.103 15.884,8.881 15.914,8.921 15.934,8.967 15.94,9.017 15.94,12.254 17.907,12.254 17.957,12.26 18.003,12.28 18.043,12.31 18.073,12.35 18.093,12.396 18.099,12.446 18.099,26.416 18.093,26.466 18.073,26.512 18.043,26.552 18.003,26.582 17.957,26.602 17.907,26.608 14.478,26.608 14.428,26.602 14.382,26.582 14.342,26.552 14.312,26.512 14.292,26.466 14.286,26.416 14.292,26.366 14.312,26.32 14.342,26.28 14.382,26.25 14.428,26.23 14.478,26.224 17.715,26.224 17.715,12.638 15.748,12.638 15.698,12.632 15.652,12.612 15.612,12.582 15.582,12.542 15.562,12.496 15.556,12.446 15.556,9.097 13.89,7.431 0.51,7.431 0.51,28.637 9.271,28.637 9.321,28.643 9.367,28.663 9.407,28.693 9.437,28.733 9.457,28.779 9.463,28.829 9.457,28.879 9.437,28.925 9.407,28.965 9.367,28.995 9.321,29.015 9.271,29.021 0.51,29.021 0.51,37.273 17.319,37.273 17.969,36.623 17.969,29.036 17.954,29.021 15.088,29.021 15.038,29.015 14.992,28.995 14.952,28.965 14.921,28.925 14.902,28.879 14.895,28.829 14.902,28.779 14.921,28.733 14.952,28.693 14.992,28.663 15.038,28.643 15.088,28.637 18.034,28.637 18.084,28.643 18.111,28.655 18.13,28.663 18.17,28.693 18.297,28.82 18.327,28.86 18.347,28.906 18.353,28.956 18.353,36.703 18.347,36.753 18.335,36.78 18.327,36.799 18.297,36.839 17.535,37.601 17.495,37.631 17.476,37.639 17.449,37.651 17.399,37.657 0.51,37.657 0.51,69.49 74.49,69.49

## Other copper
Top Layer:
  rectangle net GND: 46.609,59.436 52.07,62.865
  rectangle net GND: 46.609,65.151 51.943,68.199
  rectangle net GND: 35.814,59.563 40.767,62.738
  rectangle net GND: 37.846,65.024 42.037,68.326
Bottom Layer:
  rectangle net GND: 52.324,9.779 55.626,12.954
  rectangle net GND: 46.685,59.538 52.045,62.789
  rectangle net GND: 46.609,65.151 51.943,68.199
  rectangle net GND: 35.814,59.563 40.767,62.738
  rectangle net GND: 37.846,65.024 42.037,68.326
GND (plane layer: these items are gaps in the copper):
  lines w0.381: -0.127,7.239 13.97,7.239 15.748,9.017 15.748,12.446 17.907,12.446 17.907,26.416 15.113,26.416 14.478,26.416 ; 9.271,28.829 6.985,28.829 2.413,28.829 0.127,28.829 0.127,37.465 17.399,37.465 18.161,36.703 18.161,28.956 18.034,28.829 15.088,28.829
VCC (plane layer: these items are gaps in the copper):
  lines w0.381: -0.127,8.89 13.081,8.89 13.208,9.017 13.208,14.097 15.875,14.097 15.875,20.32 10.922,20.32 10.922,23.749 17.907,23.749 17.907,22.86 ; 8.89,28.829 0,28.829 0,37.465 17.526,37.465 18.161,36.83 18.161,34.544 18.161,31.242 18.161,29.083 17.907,28.829 14.605,28.829 ; 14.478,26.416 17.907,26.416 17.907,12.446 15.621,12.446 15.621,8.89 13.97,7.239 12.065,7.239 12.065,2.667 12.446,2.286 38.1,2.286 40.894,2.286 41.529,2.921 41.529,5.715 42.164,6.35 51.816,6.35 52.578,5.588 52.578,0.254
  lines w0.762: 56.388,-0.127 56.388,32.766 56.388,32.893 56.515,33.02 62.992,33.02 71.755,33.02 73.406,34.671 73.406,38.481 72.136,39.751 67.945,39.751 ; 56.388,68.707 53.34,65.659 53.34,61.722 54.864,60.198 61.468,60.198 63.627,58.039 63.627,49.911 64.516,49.022 67.31,49.022 67.818,48.514 67.818,39.751
  lines w1: 0,61.722 16.51,61.722 18.669,63.881 30.988,63.881 53.34,63.881 53.34,65.659 ; 56.388,68.707 66.04,68.707 66.421,68.326 66.421,63.246 67.945,61.722 75.057,61.722

## Silkscreen, mask and mechanical layers (free items; w line width, h text height)
Top Overlay:
  lines w0.254: 0.193,37.492 14.193,37.492 17.372,37.492 18.193,36.671 18.193,23.492 18.193,12.492 13.807,12.492 13.807,0.254
Mechanical 1:
  lines w0.127: 2,70 75,70 ; 0,0 75,0 ; 0,0 75,0 ; 0,0 0,70 ; 0,0 0,70 ; 0,0 0,0 ; 0,70 75,70 ; 75,0 75,70 ; 75,0 75,70

## Text inside footprints (layer, text, board x,y; h text height)
D7: Top Overlay "K" at 62.96,0.943 h0.89 r270; Top Overlay "A" at 63.085,8.068 h0.89 r270
U4: Bottom Overlay "16" at 42.621,55.296 h0.89; Bottom Overlay "9" at 41.893,44.332 h0.89; Bottom Overlay "8" at 49.787,44.209 h0.89; Bottom Overlay "1" at 49.86,55.169 h0.89